# Altium PCB UKU208.PcbDoc (part 2 of 2)
Units mm, origin at the board's own origin, x right, y up, seen from the top; angles counter-clockwise.
Board outline 222.4 x 162.3 mm, 2 copper layers (Top Layer, Bottom Layer); 178 components, 227 nets, 717 pads, 311 vias.
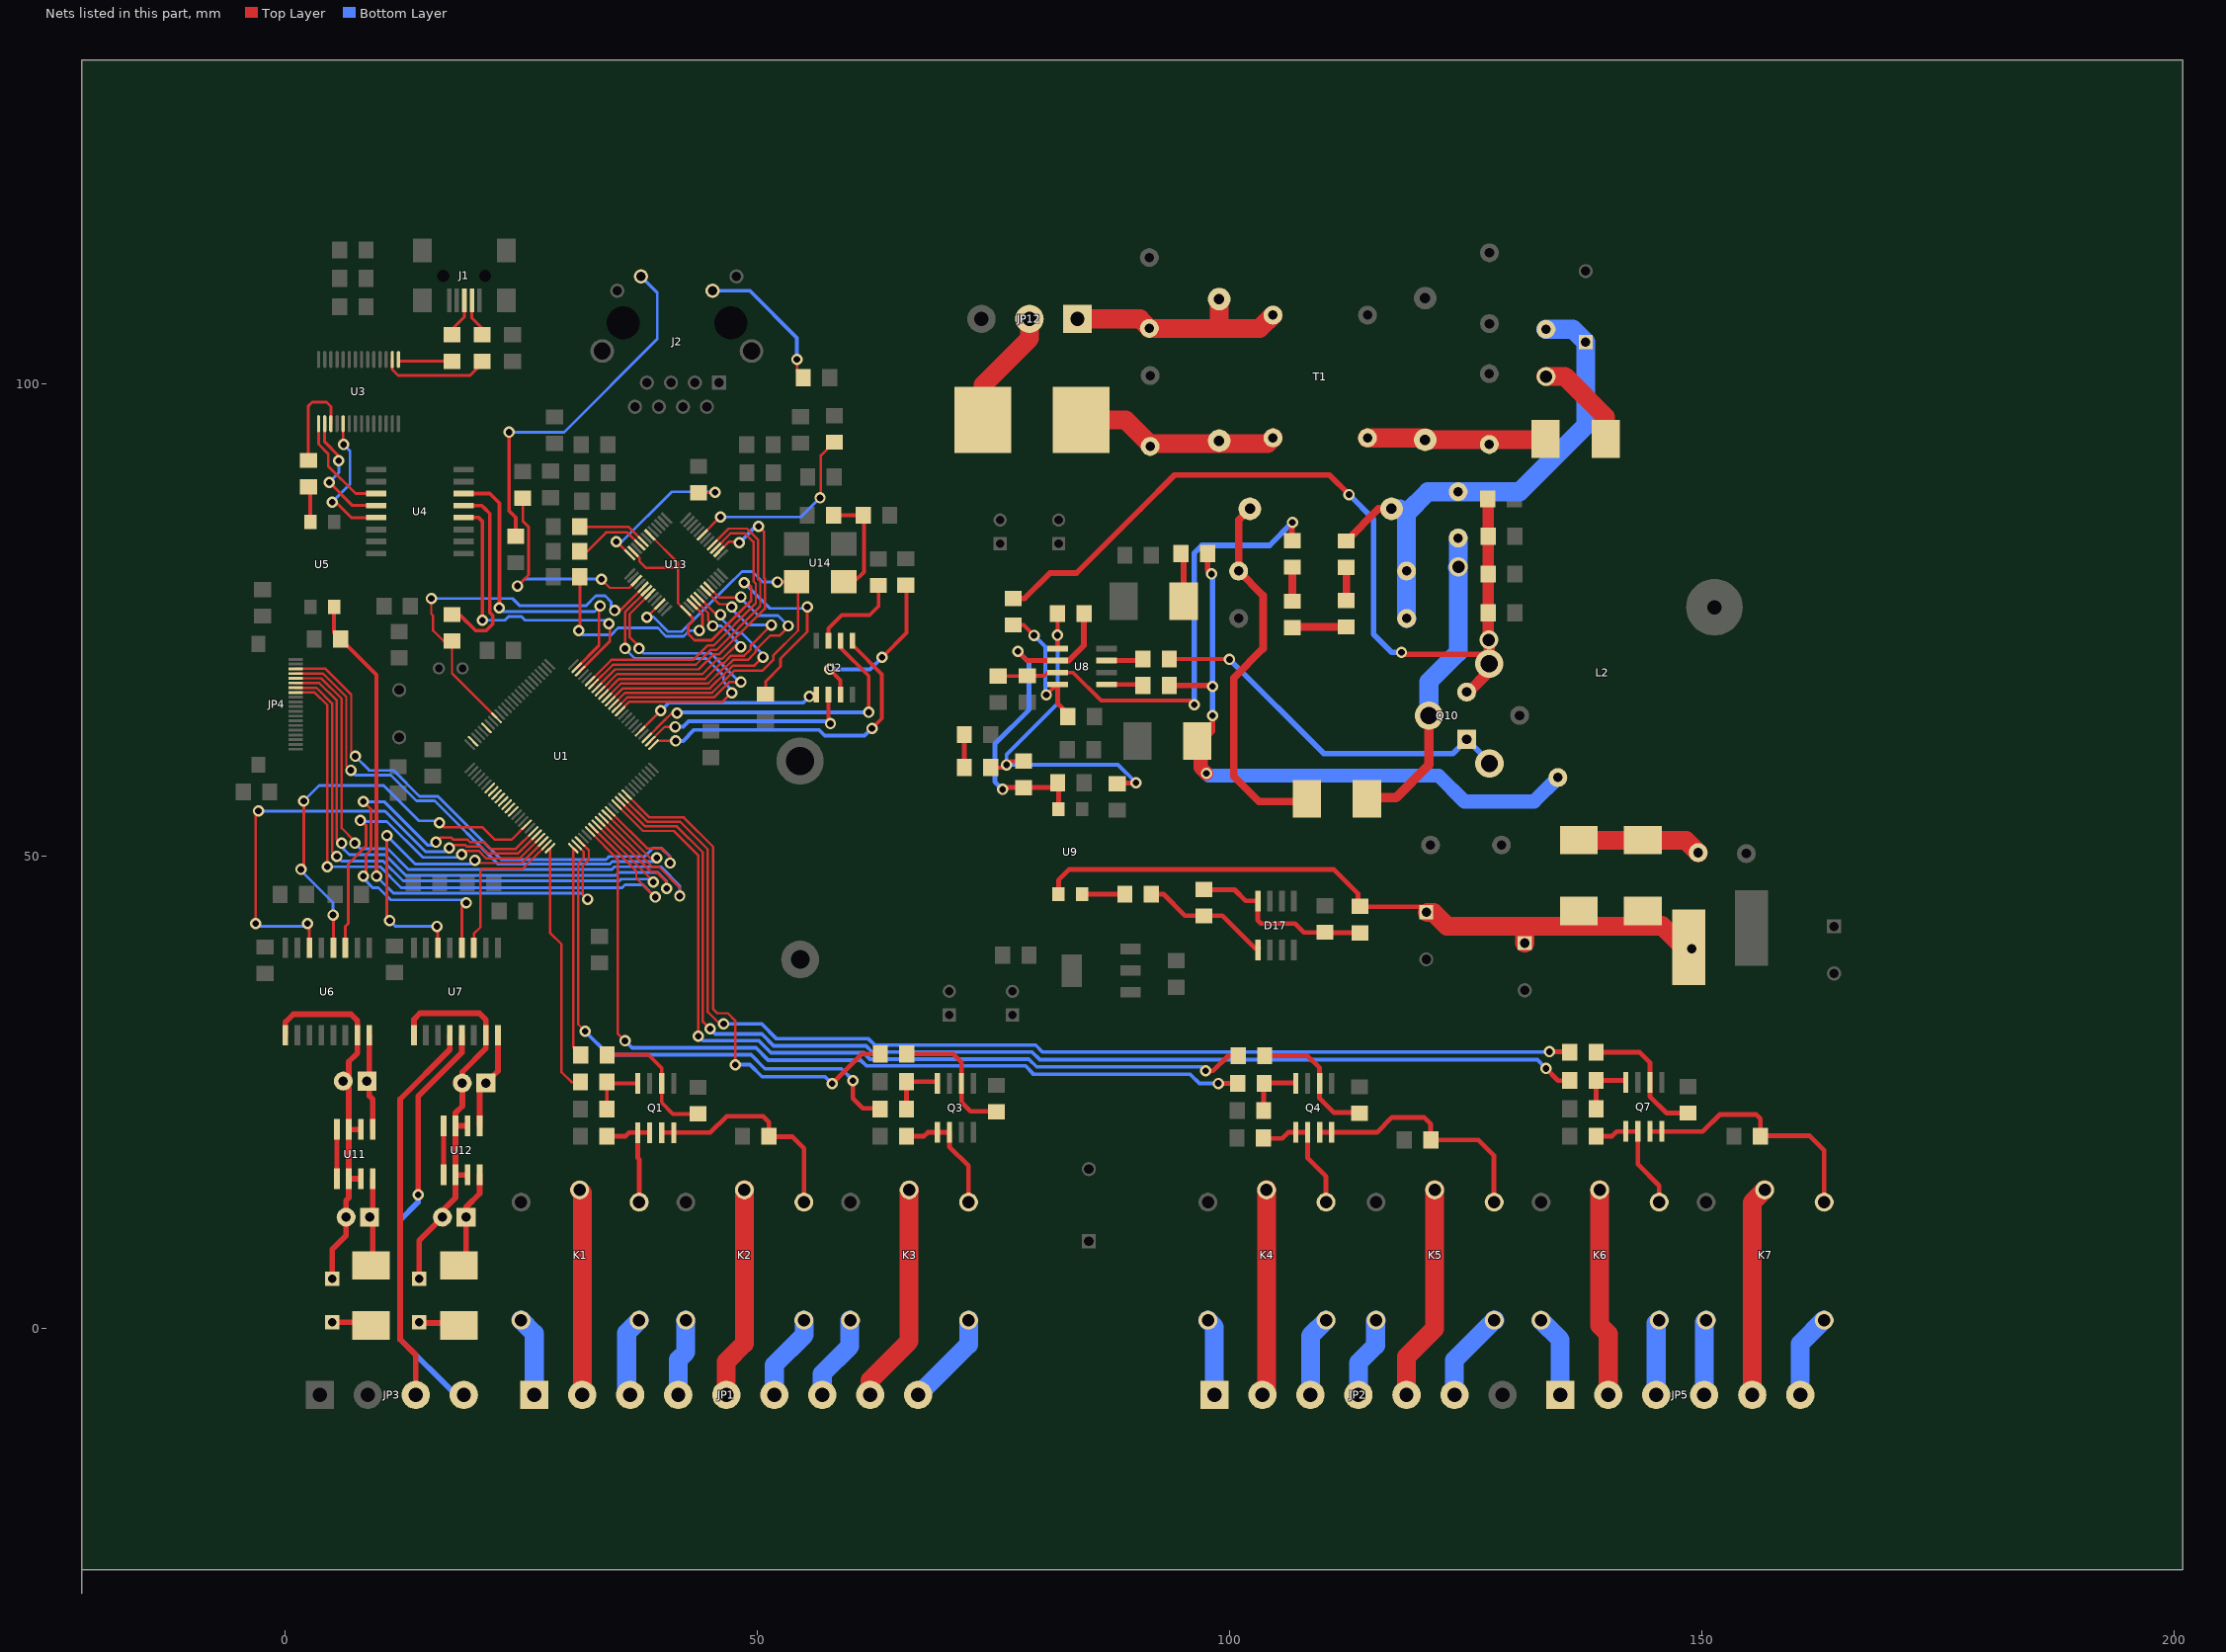
[diagram p2: the nets of this part, all layers, seen from the top]

## Via types
v1: diameter 1.2, hole 0.7, Top Layer to Bottom Layer, 302 vias
v2: diameter 1.8, hole 1, Top Layer to Bottom Layer, 5 vias
v3: diameter 2, hole 1.3, Top Layer to Bottom Layer, 2 vias
v4: diameter 3, hole 1.8, Top Layer to Bottom Layer, 2 vias

## Nets (pads, with @x,y where several pads share a name; then routed paths per layer and width w, separated by ;. In a path a pad name is that pad's centre, name@x,y a point inside that pad or via, vN(x,y) a via of type N, cw(c..) or ccw(c..) an arc to the next point about the centre after c; other vN are vias at no path point) (continued)
NetC25_1: C25.1 D12.2 R36.2 | length 40
  Top Layer w0.8: C25.1@102.15,86.8 100.957,85.607 R36.2@100.957,80.208 103.55,77.615 103.55,72 100.45,68.9 100.45,58.475 103.1,55.825 D12.2@108.15,55.825
NetC25_2: C25.2 C35.1 L2.1 R29.1 R30.2 R35.2 R36.1 | length 55.6
  Top Layer w0.8: R30.2@112.357,83.388 115.769,86.8 C25.2@117.15,86.8
  Bottom Layer w2: C25.2@117.15,86.8 118.024,86.8 118.725,86.099 ; 118.725,84.925 118.725,86.325 121,88.6 130.7,88.6 137.7,95.6 C35.1@137.7,104.45 136.35,105.8 R29.1@133.5,105.8 ; 118.737,84.925 118.737,75.198 R35.2@118.743,75.192
NetC26_1: C26.1 C32.1 JP12.1 T1.1 | length 24.8
  Top Layer w2: JP12.1@83.9,106.9 90.505,106.9 C32.1@91.508,105.898 103.198,105.898 T1.1@104.6,107.3 ; 98.8,105.898 98.9,105.998 C26.1@98.9,109
NetC26_2: C26.2 C30.2 F1.1 T1.3 | length 21.6
  Top Layer w2: F1.1@84.3,96.2 89,96.2 91.5,93.7 104,93.7 T1.3@104.6,94.3
NetC27_1: C27.1 C28.1 D8.2 D16.2 L1.1 R44.1 U9.1 | length 75.1
  Top Layer w0.5: U9.1@81.9,46 81.9,47.5 83.025,48.625 111.025,48.625 113.6,46.05 R44.1@113.6,44.7 ; R44.1@113.8,44.675 120.244,44.675 C27.1@120.818,44.101
  Top Layer w2: C27.1@120.95,44.075 121.575,44.075 123.038,42.612 145.838,42.612 ; C28.1@131.243,40.826 131.243,42.607 ; 145.749,42.701 145.838,42.612 ; L1.1@148.1,40.35 L1.1@148.55,40.35 ; L1.1@148.75,40.125 148.325,40.125 145.838,42.612
  other v2: 148.9,40.225
NetC31_2: C31.2 C34.2 D11.1 T1.4 | length 18.9
  Top Layer w2: T1.4@114.6,94.3 C34.2@120.7,94.3 ; C34.2@120.7,94.1 133.365,94.1 D11.1@133.459,94.194
NetC36_1: C36.1 R33.2 R38.1 R43.2 U8.1 | length 40.1
  Top Layer w0.4: R38.1@74.712,59.407 76.107,59.407 76.788,60.088 R33.2@78.207,60.088 ; C36.1@81.788,75.693 81.788,72.004 U8.1@81.789,72.002
  Top Layer w0.5: R43.2@87.925,57.775 v1@90.131,57.775
  Bottom Layer w0.4: v1(81.788,73.412) 81.788,66.188 76.4,60.8 v1(76.4,59.7) 88.2,59.7 v1(90.1,57.8)
NetC36_2: C36.2 C39.2 R33.1 U8.2 U9.4 | length 37.2
  Top Layer w0.5: v1(75.975,57.1) 76.163,57.288 81.812,57.288 C39.2@81.9,57.2 ; v1(77.6,71.7) 78.568,70.732 U8.2@81.789,70.732 ; C39.2@81.812,57.807 81.9,57.719 U9.4@81.9,55
  Top Layer w0.6: U8.2@81.789,70.732 82.982,70.732 84.575,72.325 C36.2@84.575,75.65
  Bottom Layer w0.5: v1(75.975,57.1) 75.15,57.925 75.15,61.9 78.775,65.525 78.775,70.525 v1(77.6,71.7)
NetC37_1: C37.1 R34.1 R42.2 U8.3 | length 52
  Top Layer w0.4: R42.2@75.707,69.088 78.569,69.088 C37.1@78.594,69.113 80.413,69.113 80.762,69.462 83.438,69.462 86.4,66.5 95.8,66.5 v1(96.25,66.05) ; v1@106.6,85.3 v1(106.65,85.35)
  Top Layer w0.6: R34.1@106.6,83.3 v1@106.6,85.3
  Bottom Layer w0.6: v1(96.25,66.05) 96.25,82.1 97.075,82.925 104.225,82.925 v1(106.65,85.35)
NetC38_1: C38.1 R45.2 U8.4 | length 15
  Top Layer w0.4: R45.2@77.093,74.512 77.106,74.5 78.2,74.5 v1(79.3,73.4) ; v1(80.6,67.1) 81.692,68.192 U8.4@81.789,68.192
  Top Layer w0.5: U8.4@81.789,68.192 81.789,66.211 82.888,65.112 C38.1@82.888,64.793
  Bottom Layer w0.4: v1(79.3,73.4) 80.5,72.2 80.5,67.2 v1(80.6,67.1)
NetC40_1: C40.1 D17.8 R41.1 R44.2 | length 19.5
  Top Layer w0.5: C40.1@97.25,46.475 100.525,46.475 101.711,45.289 D17.8@102.998,45.289 ; D17.8@102.975,45.175 102.975,43.25 103.325,42.9 106.925,42.9 107.875,41.95 110.125,41.95 110.163,41.912 R44.2@113.793,41.912
NetC40_2: C40.2 D17.1 R50.1 | length 13.7
  Top Layer w0.5: R50.1@91.712,46.007 92.993,46.007 95.275,43.725 99.25,43.725 102.675,40.3 D17.1@103.075,40.3
NetC43_1: C43.1 D9.2 U11.8 | length 9.3
  Top Layer w0.6: D9.2@9.114,6.71 9.31,6.905 U11.8@9.31,15.889
NetC43_2: C43.2 C44.2 U6.9 U6.15 U11.2 U11.3 U11.6 U11.7 X2.1 | length 41.4
  Top Layer w0.6: U6.9@0.055,31.075 0.055,32.455 0.9,33.3 7,33.3 7.675,32.625 7.675,29.175 6.77,28.27 6.77,13.87 6.479,13.579 6.479,9.879 5.012,8.412 X2.1@5.012,5.305 ; C44.2@6.179,26.214 C44.2@6.77,25.624 ; U11.6@6.77,15.889 U11.7@8.04,15.889 ; U11.3@6.77,21.089 U11.2@8.04,21.089
NetC44_1: C44.1 U6.16 U11.1 | length 10.1
  Top Layer w0.6: U6.16@8.945,31.075 8.945,24.655 9.31,24.29 U11.1@9.31,21.089
NetC45_1: C45.1 D18.2 U12.8 | length 10.8
  Top Layer w0.6: D18.2@18.414,6.71 19.179,7.474 19.179,12.879 20.61,14.31 U12.8@20.61,16.289 ; C45.1@19.179,11.814 C45.1@19.41,12.045
NetC45_2: C45.2 C46.2 U7.9 U7.15 U12.2 U12.3 U12.6 U12.7 X4.1 | length 43
  Top Layer w0.6: U7.9@13.655,31.075 13.655,32.755 14.3,33.4 20.6,33.4 21.275,32.725 U7.15@21.275,31.075 21.275,29.675 18.779,27.179 18.779,23.579 18.07,22.87 18.07,13.87 16.679,12.479 C45.2@16.679,11.814 ; X4.1@14.212,5.305 14.212,9.347 C45.2@16.879,12.014 ; U12.6@18.07,16.289 U12.7@19.34,16.289 ; U12.3@18.07,21.489 U12.2@19.34,21.489
NetC46_1: C46.1 U7.16 U12.1 | length 10.4
  Top Layer w0.6: U12.1@20.61,21.489 20.61,25.345 22.545,27.281 U7.16@22.545,31.075
NetC55_1: C55.1 R66.1 U14.4 | length 11.8
  Top Layer w0.4: C55.1@58.093,86.105 61.33,86.105 R66.1@61.35,86.125 ; U14.4@59.175,79.075 60.275,79.075 61.3,80.1 61.3,85.975 R66.1@61.2,86.075
NetC56_1: C56.1 U13.18 U13.23 U13.37 | length 48.3
  Top Layer w0.254: U13.23@36.868,82.274 37.55,81.592 37.55,81.2 38.225,80.525 41.375,80.525 41.6,80.7 ; U13.18@38.636,84.042 41.6,81.078 41.6,76.835 U13.37@42.419,76.016
  Top Layer w0.3: U13.37@42.419,76.016 43.175,75.26 43.175,74.9 42.675,74.4 42.675,73.575 43.375,72.875 45.175,72.875 49.35,77.05 49.35,78.5 48.875,78.975 v1(48.625,78.975) ; C56.1@50.9,67.2 50.9,68.525 52.475,70.1 52.475,70.95 55.3,73.775 v1(55.3,76.4)
  Bottom Layer w0.3: v1(48.625,78.975) 51.35,76.25 55.15,76.25 v1(55.3,76.4)
NetC?_2: 
NetC?_2: 
NetC?_2: 
NetC?_2: 
NetD1_1: D1.1 K1.4 Q1.5 Q1.6 | length 12.2
  Top Layer w0.5: D1.1@34.095,20.391 36.066,20.391 36.438,20.763 Q1.6@38.62,20.763 ; Q1.5@37.35,20.763 37.35,18.098 37.498,17.95 37.498,13.373 K1.4@37.475,13.35
NetD2_1: D2.1 K2.4 Q1.7 Q1.8 | length 24.2
  Top Layer w0.5: Q1.7@39.89,20.763 45.038,20.763 46.775,22.5 50.625,22.5 51.25,21.875 51.25,20.325 53.725,20.325 54.96,19.09 K2.4@54.96,13.265 ; K2.4@54.9,13.404 54.9,13.325 K2.4@55,13.225
NetD3_1: D3.1 K3.4 Q3.5 Q3.6 | length 12.9
  Top Layer w0.5: D3.1@65.795,20.391 67.666,20.391 68.063,20.788 Q3.6@70.345,20.788 70.345,19.28 72.374,17.251 K3.4@72.374,13.404
NetD4_1: D4.1 K4.4 Q4.5 Q4.6 | length 13.1
  Top Layer w0.5: D4.1@103.675,20.15 105.55,20.15 106.188,20.788 Q4.6@108.27,20.788 108.27,18.055 110.208,16.117 K4.4@110.208,13.404 ; K4.4@110.208,13.425 K4.4@110.275,13.425
NetD5_1: D5.1 K5.4 Q4.7 Q4.8 | length 26.8
  Top Layer w0.5: Q4.7@109.54,20.788 115.588,20.788 117.175,22.375 120.6,22.375 121.275,21.7 121.275,20.075 121.327,20.023 121.35,20 126.35,20 127.975,18.375 K5.4@127.975,13.275
NetD6_1: D6.1 K6.4 Q7.5 Q7.6 | length 13
  Top Layer w0.5: D6.1@138.795,20.391 140.491,20.391 140.975,20.875 Q7.6@143.2,20.875 ; Q7.6@143.22,20.888 143.22,17.405 145.474,15.151 K6.4@145.474,13.404
NetD7_1: D7.1 K7.4 Q7.7 Q7.8 | length 27.3
  Top Layer w0.5: Q7.7@144.49,20.888 145.763,20.888 150.088,20.888 151.875,22.675 155.75,22.675 156.195,22.23 156.195,20.43 156.2,20.425 161.425,20.425 162.941,18.909 K7.4@162.941,13.404
NetD8_1: D8.1 D16.1 L2.8 | length 13.1
  Top Layer w2: D16.1@137.025,51.7 148.3,51.7 L2.8@149.6,50.4
NetD9_1: D9.1 X1.1 | length 4.2
  Top Layer w0.6: X1.1@5.012,0.705 8.77,0.705 D9.1@9.114,0.36
NetD10_2: D10.2 U4.13 | length 20.2
  Top Layer w0.4: D10.2@17.691,75.605 17.796,75.5 18.6,75.5 20.2,73.9 21.3,73.9 22,74.6 22,75.5 21.7,75.8 21.7,86.3 21.099,86.901 20.86,87.14 U4.13@18.932,87.14
NetD11_2: D11.2 R29.2 | length 10.4
  Top Layer w2: R29.2@133.5,100.8 135.5,100.8 139.809,96.491 D11.2@139.809,94.194
NetD12_1: D12.1 L2.2 Q10.2 | length 33.3
  Top Layer w1: D12.1@114.741,56.206 117.606,56.206 121.1,59.7 Q10.2@121.1,64.9
  Bottom Layer w2: Q10.2@121,65 Q10.2@121.1,64.9 121.1,68.5 124.2,71.6 L2.2@124.2,83.7 ; v3@124.125,80.6 v3@124.2,80.675
  other v3: 124.225,80.65
NetD13_1: D13.1 R8.1 | length 5.1
  Top Layer w0.6: R8.1@94.863,82.068 95.15,81.781 D13.1@95.15,77.05
NetD14_1: D14.1 L2.4 R8.2 R39.1 | length 68.7
  Top Layer w0.6: R39.1@93.612,68.107 98.093,68.107 v1(98.2,68) ; D14.1@97.075,62.15 98.2,63.275 v1(98.2,64.9) v1@98.041,64.741 ; R8.2@97.663,82.068 97.663,80.337 v1(98.1,79.9)
  Top Layer w1.5: D14.1@96.95,62.175 96.95,59.4 v1(97.55,58.8)
  Bottom Layer w0.6: v1(98.1,79.9) 98.2,79.8 98.2,65 98.3,64.9 v1(98.2,64.9)
  Bottom Layer w1.5: v1(97.55,58.8) 97.8,58.55 122.125,58.55 124.875,55.8 132.225,55.8 L2.4@134.75,58.325
NetD18_1: D18.1 X3.1 | length 4.4
  Top Layer w0.6: X3.1@14.212,0.605 17.959,0.605 D18.1@18.414,1.06
NetD?_1: 
NetD?_1: 
NetD?_1: 
NetD?_1: 
NetD?_1: 
NetD?_1: 
NetD?_1: 
NetF1_2: F1.2 JP12.2 | length 12.7
  Top Layer w2: F1.2@73.9,96.2 73.9,99.9 78.82,104.82 JP12.2@78.82,106.9
NetJ1_2: J1.2 R26.1 | length 4.1
  Top Layer w0.3: J1.2@19.8,108.87 19.8,107 20.893,105.907 R26.1@20.893,105.212
NetJ1_3: J1.3 R25.1 | length 4.2
  Top Layer w0.3: R25.1@17.693,105.212 17.693,105.793 19,107.1 J1.3@19,108.87
NetJ2_10: J2.10 R64.1 | length 15.5
  Top Layer w0.254: v1(54.2,102.6) 54.2,101.352 R64.1@54.882,100.67
  Bottom Layer w0.4: J2.10@45.27,109.88 49.245,109.88 49.245,109.855 54.2,104.9 v1@54.2,102.575
NetJ2_11: J2.11 R65.1 | length 38.5
  Top Layer w0.4: v1@23.725,94.95 23.725,86.6 24.445,85.88 R65.1@24.445,83.893
  Bottom Layer w0.3: v1(23.725,94.9) 29.55,94.9 39.425,104.775 39.425,109.675 J2.11@37.7,111.4
NetJP1_1: JP1.1 K1.3 | length 8.5
  Bottom Layer w2: K1.3@24.975,0.925 26.4,-0.5 JP1.1@26.4,-7 ; K1.3@25.008,0.892 K1.3@25.008,0.904
NetJP1_2: JP1.2 K1.1 | length 21.8
  Top Layer w2: K1.1@31.175,14.7 31.48,14.395 JP1.2@31.48,-7
NetJP1_3: JP1.3 K1.2 | length 8.6
  Bottom Layer w2: JP1.3@36.56,-7 36.175,-6.615 36.175,-0.429 K1.2@37.508,0.904
NetJP1_4: JP1.4 K2.3 | length 8.2
  Bottom Layer w2: JP1.4@41.64,-7 41.64,-3.285 42.441,-2.484 K2.3@42.441,0.904
NetJP1_5: JP1.5 K2.1 | length 22.5
  Top Layer w2: JP1.5@46.73,-7 46.73,-3.47 48.641,-1.559 K2.1@48.641,14.704
NetJP1_6: JP1.6 K2.2 | length 9.2
  Bottom Layer w2: JP1.6@51.81,-7 51.81,-3.815 54.975,-0.65 54.975,0.87 K2.2@54.941,0.904
NetJP1_7: JP1.7 K3.3 | length 9.1
  Bottom Layer w2: JP1.7@56.89,-7 56.89,-4.76 59.8,-1.85 K3.3@59.8,0.9
NetJP1_8: JP1.8 K3.1 | length 23.4
  Top Layer w2: JP1.8@61.955,-7 61.955,-5.445 66.074,-1.326 66.074,14.624 K3.1@66.1,14.65
NetJP1_9: JP1.9 K3.2 | length 10.1
  Bottom Layer w2: JP1.9@67.035,-7 72.374,-1.661 K3.2@72.374,0.904
NetJP2_1: JP2.1 K4.3 | length 8.2
  Bottom Layer w2: K4.3@97.708,0.904 98.4,0.212 JP2.1@98.4,-7
NetJP2_2: JP2.2 K4.1 | length 21.9
  Top Layer w2: JP2.2@103.475,-7.025 103.49,-7.01 103.908,-6.592 K4.1@103.908,14.704
NetJP2_3: JP2.3 K4.2 | length 8.6
  Bottom Layer w2: JP2.3@108.56,-7 108.56,-0.744 K4.2@110.208,0.904
NetJP2_4: JP2.4 K5.3 | length 8.7
  Bottom Layer w2: JP2.4@113.64,-7 113.64,-3.585 115.454,-1.771 115.454,0.85 K5.3@115.508,0.904
NetJP2_5: JP2.5 K5.1 | length 22.9
  Top Layer w2: JP2.5@118.73,-7 118.73,-2.97 121.708,0.008 K5.1@121.708,14.704
NetJP2_6: JP2.6 K5.2 | length 9.7
  Bottom Layer w2: JP2.6@123.81,-7 123.81,-3.294 K5.2@128.008,0.904 K5.2@128.071,0.904
NetJP3_3: JP3.3 U7.12 | length 40.9
  Top Layer w0.6: JP3.3@13.86,-7 13.86,-2.76 12.2,-1.1 12.2,24.3 17.465,29.565 U7.12@17.465,31.075
NetJP3_4: JP3.4 U7.13 | length 44.1
  Top Layer w0.6: v1(14.1,14.2) 14.1,24.6 18.735,29.235 U7.13@18.735,31.075
  Bottom Layer w0.6: v1(14.1,14.2) 14.1,13.4 12.2,11.5 12.2,-1.1 18.1,-7 JP3.4@18.94,-7
NetJP5_1: 
NetJP5_1: JP5.1 K6.3 | length 8.7
  Bottom Layer w2: K6.3@132.975,0.875 135,-1.15 JP5.1@135,-7
NetJP5_2: 
NetJP5_2: JP5.2 K6.1 | length 22.1
  Top Layer w2: K6.1@139.174,14.704 139.174,0.376 140.08,-0.53 JP5.2@140.08,-7
NetJP5_3: JP5.3 K6.2 | length 8.1
  Bottom Layer w2: JP5.3@145.16,-7 145.16,0.585 K6.2@145.5,0.925
NetJP5_4: JP5.4 K7.3 | length 8
  Bottom Layer w2: JP5.4@150.24,-7 150.24,0.715 K7.3@150.45,0.925
NetJP5_5: JP5.5 K7.1 | length 22.2
  Top Layer w2: JP5.5@155.33,-7 155.33,13.393 K7.1@156.641,14.704
NetJP5_6: JP5.6 K7.2 | length 9
  Bottom Layer w2: JP5.6@160.41,-7 160.41,-1.565 K7.2@162.9,0.925
NetJP?_1: 
NetJP?_1: 
NetJP?_1: 
NetJP?_1: 
NetJP?_1: 
NetJP?_1: 
NetJP?_1: 
NetJP?_2: 
NetJP?_2: 
NetJP?_2: 
NetJP?_2: 
NetJP?_2: 
NetJP?_2: 
NetJP?_2: 
NetJP?_3: 
NetJP?_3: 
NetJP?_3: 
NetJP?_3: 
NetJP?_3: 
NetJP?_3: 
NetJP?_3: 
NetL2_5: 
NetL2_6: 
NetQ1_2: Q1.2 R2.2 R10.2 | length 14.4
  Top Layer w0.4: R2.2@34.113,28.993 38.482,28.993 39.89,27.585 39.89,23.935 41.075,22.75 R10.2@43.775,22.75
NetQ1_4: Q1.4 R1.2 R9.2 | length 6.1
  Top Layer w0.4: R9.2@34.088,23.268 34.088,26.038 34.1,26.05 34.187,25.963 Q1.4@37.35,25.963
NetQ3_2: Q3.2 R18.2 R23.2 | length 14.4
  Top Layer w0.5: R23.2@65.838,29.093 70.732,29.093 71.625,28.2 71.625,23.975 72.575,23.025 R18.2@75.2,23.025
NetQ3_4: Q3.4 R3.2 R11.2 | length 6.2
  Top Layer w0.5: R11.2@65.8,26.175 R11.2@65.813,26.162 ; R3.2@65.813,23.268 R11.2@65.813,26.162 ; Q3.4@69.075,25.988 68.901,26.162 R11.2@65.813,26.162
NetQ4_2: Q4.2 R5.2 R13.2 | length 14.3
  Top Layer w0.5: R5.2@103.713,28.893 108.232,28.893 109.525,27.6 109.525,24.4 111.025,22.9 R13.2@113.7,22.9
NetQ4_4: Q4.4 R4.2 R12.2 | length 6.3
  Top Layer w0.5: R12.2@103.613,23.093 103.613,25.938 103.653,25.978 103.7,26.025 106.925,26.025 Q4.4@106.975,25.975
NetQ7_2: Q7.2 R7.2 R15.2 | length 14.5
  Top Layer w0.5: R7.2@138.813,29.268 143.407,29.268 144.49,28.185 144.49,24.61 146.263,22.837 R15.2@148.543,22.837
NetQ7_4: Q7.4 R6.2 R14.2 | length 6.4
  Top Layer w0.5: R14.2@138.775,23.125 138.813,23.163 R6.2@138.813,26.293 141.732,26.293 141.875,26.15 Q7.4@141.925,26.15
NetQ10_1: Q10.1 R40.1 | length 39.8
  Top Layer w0.4: R40.1@93.612,70.907 99.943,70.907 v1(100,70.85)
  Bottom Layer w0.6: v1(100,70.85) 109.975,60.875 123.625,60.875 Q10.1@125.125,62.375 ; Q10.1@125.1,62.375 Q10.1@125.125,62.375 ; v4@127.5,59.875 127.5,60 Q10.1@125.125,62.375
  other v4: 127.5,59.825
NetQ10_3: Q10.3 R45.1 R46.1 R47.1 R48.1 R49.1 | length 93.2
  Top Layer w0.6: R45.1@77.093,77.312 78.312,77.312 81,80 83.8,80 90.604,86.804 94.175,90.375 110.575,90.375 v1(112.65,88.3) ; v1(118.2,71.6) 118.407,71.393 v4@127.388,71.393
  Top Layer w1.2: Q10.3@125.1,67.4 125.3,67.4 127.388,69.488 v4@127.388,71.393 ; R49.1@127.338,87.843 127.388,87.793 R47.1@127.388,79.893 R48.1@127.388,75.793 v3@127.388,72.925 ; v3(127.45,72.925) 127.475,72.9 v4(127.475,70.4)
  Bottom Layer w0.6: v1(112.65,88.3) 115.25,85.7 115.25,73.5 117.15,71.6 v1(118.2,71.6)
NetQ?_1: 
NetQ?_1: 
NetQ?_1: 
NetQ?_1: 
NetQ?_1: 
NetQ?_1: 
NetQ?_1: 
NetR19_1: R19.1 U2.3 | length 18
  Top Layer w0.4: v1(57.675,69.8) 58.81,68.665 U2.3@58.81,67.125 ; v1(63.225,71.075) 65.8,73.65 R19.1@65.8,78.8
  Bottom Layer w0.4: v1(57.675,69.8) 61.95,69.8 v1(63.225,71.075)
NetR20_2: R20.2 U2.7 | length 9.7
  Top Layer w0.4: U2.7@57.54,72.825 57.54,74.14 58.95,75.55 61.9,75.55 62.85,76.5 R20.2@62.85,78.625
NetR25_2: R25.2 U3.15 | length 5.8
  Top Layer w0.3: U3.15@12.019,102.604 12.211,102.412 R25.2@17.693,102.412
NetR26_2: R26.2 U3.16 | length 11.6
  Top Layer w0.3: U3.16@11.369,102.604 11.369,101.531 12,100.9 19.6,100.9 20.893,102.193 R26.2@20.893,102.412
NetR27_1: R27.1 U3.3 | length 10.3
  Top Layer w0.3: R27.1@2.493,91.912 2.493,97.693 2.9,98.1 4.4,98.1 4.869,97.631 U3.3@4.869,95.804
NetR27_2: R27.2 U5.2 | length 3.8
  Top Layer w0.4: R27.2@2.493,89.112 2.7,88.906 U5.2@2.7,85.4
NetR30_1: R30.1 R31.2 | length 3.5
  Top Layer w0.8: R31.2@112.357,77.088 R30.1@112.357,80.588
NetR31_1: R31.1 R32.2 | length 5.7
  Top Layer w0.8: R32.2@106.643,74.212 106.719,74.288 R31.1@112.357,74.288
NetR32_1: R32.1 R34.2 | length 3.6
  Top Layer w0.8: R32.1@106.643,77.012 R34.2@106.643,80.612
NetR37_2: R37.2 R38.2 | length 3.5
  Top Layer w0.5: R38.2@71.912,59.407 R37.2@71.912,62.907
NetR39_2: R39.2 U8.5 | length 3.9
  Top Layer w0.5: U8.5@86.989,68.192 90.727,68.192 R39.2@90.812,68.107
NetR40_2: R40.2 U8.7 | length 3.9
  Top Layer w0.5: U8.7@86.989,70.732 90.638,70.732 R40.2@90.812,70.907
NetR50_2: R50.2 U9.2 | length 4.4
  Top Layer w0.5: U9.2@84.4,46 88.8,46 R50.2@88.825,46.025
NetR52_1: R52.1 U13.7 | length 20.6
  Top Layer w0.254: U13.7@44.187,84.042 46.1,85.955 v1(46.13,85.925) ; v1(56.65,87.95) 56.75,88.05 56.75,92.452 R52.1@58.155,93.857
  Bottom Layer w0.3: v1(46.13,85.925) 54.6,85.925 56.625,87.95 v1(56.65,87.95)
NetR54_1: R54.1 U13.27 | length 23.7
  Top Layer w0.254: v1(33.5,79.325) 34.4,78.425 36.449,78.425 U13.27@37.222,79.198
  Top Layer w0.3: v1(24.625,78.625) 25.8,79.8 25.8,84.875 25.2,85.475 R54.1@25.2,88
  Bottom Layer w0.3: v1(24.625,78.625) 24.65,78.625 25.375,79.35 33.475,79.35 v1(33.5,79.325)
NetR56_1: R56.1 U13.39 | length 22.9
  Top Layer w0.3: v1(31.1,73.9) 31.218,74.018 R56.1@31.218,79.605 ; U13.39@43.126,76.723 44.2,75.65 44.2,74.4 v1@43.7,73.9
  Bottom Layer w0.3: v1(31.1,73.9) 31.525,73.475 34.575,73.475 35.275,74.175 39.482,74.175 40.137,73.52 40.347,73.31 42.228,73.31 42.818,73.9 v1@43.7,73.9
  other v1: 43.875,73.925
NetR57_1: R57.1 U13.21 | length 7.7
  Top Layer w0.254: R57.1@31.218,82.305 32.005,82.305 34,84.3 36.257,84.3 U13.21@37.575,82.981
NetR58_1: R58.1 U13.20 | length 7.4
  Top Layer w0.254: R58.1@31.218,84.905 36.359,84.905 U13.20@37.929,83.335
NetR63_2: R63.2 U13.24 | length 16.4
  Top Layer w0.254: v1(35.075,83.325) 35.11,83.325 U13.24@36.515,81.92 ; R63.2@43.795,88.493 45.468,88.493 v1(45.525,88.55)
  Bottom Layer w0.3: v1(35.075,83.325) 35.675,83.325 40.95,88.6 45.475,88.6 v1(45.525,88.55)
NetR?_1: 
NetR?_2: 
NetU3_1: U3.1 U4.3 | length 11.2
  Top Layer w0.3: U3.1@3.569,95.804 3.569,93.631 4.6,92.6 4.6,91.3 7.49,88.41 U4.3@9.682,88.41
NetU3_2: U3.2 U4.4 | length 13.2
  Top Layer w0.3: U3.2@4.219,95.804 4.219,93.881 5.7,92.4 v1(5.7,91.9) ; v1(4.7,89.6) 7.16,87.14 U4.4@9.682,87.14
  Bottom Layer w0.3: v1(4.7,89.6) 5.7,90.6 v1(5.7,91.9)
NetU3_5: U3.5 U4.5 | length 14.8
  Top Layer w0.3: v1(5,87.5) 5.4,87.5 7.03,85.87 U4.5@9.682,85.87 ; U3.5@6.169,95.804 6.169,93.631 v1(6.2,93.6)
  Bottom Layer w0.3: v1(5,87.5) 6.9,89.4 6.9,92.9 v1(6.2,93.6)
NetU4_9: 
NetU4_9: 
NetU4_10: 
NetU4_10: 
NetU11_4: U11.4 U11.5 | length 5.2
  Top Layer w0.5: U11.5@5.5,15.889 U11.4@5.5,21.089
NetU12_4: U12.4 U12.5 | length 5.3
  Top Layer w0.5: U12.5@16.8,16.225 U12.4@16.8,21.489
P0_0: U1.46 U6.6 | length 52.8
  Top Layer w0.254: v1(17.4,50.9) 17.7,51.2 19.1,51.2 19.256,51.044 20.684,51.044 20.728,51 20.8,51 21.5,50.3 24.657,50.3 U1.46@26.648,52.291
  Top Layer w0.3: v1(-3.1,42.9) -3.1,54.5 v1(-2.8,54.8) ; v1@2.525,42.65 2.595,42.58 U6.6@2.595,40.325
  Bottom Layer w0.3: v1(-3.1,42.9) -2.8,42.6 v1@2.525,42.6 ; v1(-2.8,54.8) 10.6,54.8 14.9,50.5 17,50.5 v1(17.4,50.9)
  other v1: 2.4,42.9
P0_1: U1.47 U6.3 | length 36.3
  Top Layer w0.254: v1(18.7,50.2) 19.1,50.6 20.5,50.6 21.3,49.8 24.864,49.8 U1.47@27.002,51.938
  Top Layer w0.3: U6.3@6.405,40.325 6.405,42.605 6.7,42.9 6.7,49.2 8.6,51.1 8.6,53.3 v1@8.2,53.7
  Bottom Layer w0.3: v1@8.2,53.7 10.8,53.7 14.6,49.9 18.4,49.9 v1(18.7,50.2)
  other v1: 8,53.8
P0_2: U1.98 U4.12 | length 33.1
  Top Layer w0.3: U1.98@31.245,69.616 34.4,72.771 v1@34.4,75
  Top Layer w0.4: U4.12@18.932,85.87 20.53,85.87 20.9,85.5 v1(20.9,75)
  Bottom Layer w0.3: v1(20.9,75) 23.29,75 23.682,75.392 25.043,75.392 25.435,75 v1@34.4,75
  other v1: 34.3,74.625
P0_3: U1.99 U4.14 | length 34
  Top Layer w0.3: U1.99@30.891,69.969 33.25,72.328 33.25,76.4 v1(33.375,76.525)
  Top Layer w0.4: U4.14@18.932,88.41 21.69,88.41 22.7,87.4 v1(22.7,76.3)
  Bottom Layer w0.3: v1(22.7,76.3) 23.1,75.9 32.8,75.9 v1@33.4,76.5
P0_5: U1.80 U2.1 | length 20.2
  Top Layer w0.254: U1.80@37.609,63.252 39.236,64.879 v1(39.775,65.418) ; v1(55.525,66.925) 56.1,66.925 U2.1@56.25,67.075
  Bottom Layer w0.4: v1(39.775,65.418) 40.632,66.275 54.875,66.275 v1(55.525,66.925)
P0_7: U1.78 U2.6 | length 33.4
  Top Layer w0.254: U1.78@38.316,62.545 40.236,64.464 ; 40.25,64.45 40.975,65.175 v1(41.525,65.175)
  Top Layer w0.4: U2.6@58.81,72.825 58.81,72.09 61.8,69.1 v1(61.8,65.25)
  Bottom Layer w0.4: v1(41.525,65.175) 41.6,65.25 v1(61.8,65.25)
P0_8: U1.77 U2.2 | length 23.2
  Top Layer w0.254: U1.77@38.669,62.191 40.203,63.725 v1(41.325,63.725)
  Top Layer w0.4: U2.2@57.54,67.125 57.54,64.26 v1(57.75,64.05)
  Bottom Layer w0.4: v1(41.325,63.725) 42.15,63.725 42.725,64.3 57.525,64.3 57.75,64.075 v1(57.75,64.05)
P0_9: U1.76 U2.5 | length 35.4
  Top Layer w0.254: U1.76@39.023,61.837 39.41,62.225 v1(41.375,62.225)
  Top Layer w0.4: U2.5@60.08,72.825 60.08,72.395 63.2,69.275 63.2,64.6 v1(62.15,63.55)
  Bottom Layer w0.4: v1(41.375,62.225) 42.15,62.225 43.325,63.4 56.525,63.4 57.15,62.775 61.375,62.775 v1(62.15,63.55)
P0_10: U1.48 U7.6 | length 35.8
  Top Layer w0.254: v1(20.1,49.6) 20.3,49.4 20.3,49.3 25.071,49.3 U1.48@27.355,51.584
  Top Layer w0.3: v1(10.8,52.2) 10.8,43.5 v1(11.1,43.2) ; v1(16.1,42.6) 16.195,42.505 U7.6@16.195,40.325
  Bottom Layer w0.3: v1(10.8,52.2) 13.8,49.2 19.7,49.2 v1(20.1,49.6) ; v1(11.1,43.2) 11.7,42.6 v1(16.1,42.6)
P0_11: U1.49 U7.3 | length 16.6
  Top Layer w0.254: U7.3@20.005,40.325 20.005,41.805 20.7,42.5 20.7,48.5 20.9,48.7 25.178,48.7 U1.49@27.709,51.231
P0_15: JP4.3 U1.62 | length 62.1
  Top Layer w0.254: JP4.3@1.159,69.857 4.293,69.857 7.025,67.125 7.025,61.025 v1(7.45,60.6) ; U1.62@34.426,54.766 38.343,50.85 39.875,50.85 40.775,49.95 v1(40.775,49.3)
  Bottom Layer w0.3: v1(7.45,60.6) 8.9,59.15 8.9,59.1 11.525,59.1 14.25,56.375 16.2,56.375 22.9,49.675 34.025,49.675 34.35,50 38.075,50 38.925,50.85 39.9,50.85 40.775,49.975 v1(40.775,49.3)
P0_17: JP4.4 U1.61 | length 58.4
  Top Layer w0.254: JP4.4@1.159,69.357 4.043,69.357 6.5,66.9 6.5,59.525 v1@6.9,59.125 ; U1.61@34.1,54.4 38.65,49.85 v1(39.375,49.85)
  Bottom Layer w0.3: v1@6.9,59.125 7.425,58.6 11.2,58.6 13.925,55.875 15.875,55.875 22.575,49.175 34.375,49.175 34.65,49.45 39,49.45 39.375,49.825 v1(39.375,49.85)
  other v1: 6.975,59.125
P0_18: JP4.5 U1.60 | length 71.3
  Top Layer w0.254: JP4.5@1.159,68.857 3.843,68.857 6,66.7 6,53 7.4,51.6 v1(7.4,51.4) ; U1.60@33.719,54.059 38.879,48.9 39.6,48.9 41.8,46.7 v1(41.8,45.8)
  Bottom Layer w0.3: v1(7.4,51.4) 8,50.8 10.9,50.8 13.1,48.6 34.6,48.6 34.9,48.9 39.8,48.9 41.8,46.9 v1(41.8,45.8)
P0_19: JP4.6 U1.59 | length 68.1
  Top Layer w0.254: JP4.6@1.159,68.357 3.643,68.357 5.5,66.5 5.5,51.8 v1@5.9,51.4 ; U1.59@33.366,53.706 33.394,53.706 38.7,48.4 39.3,48.4 40.4,47.3 v1(40.4,46.6)
  Bottom Layer w0.3: v1@5.9,51.4 5.9,51.1 6.8,50.2 10.6,50.2 12.8,48 35,48 35.3,48.3 39.5,48.3 40.4,47.4 v1(40.4,46.6)
  other v1: 6,51.4
P0_20: JP4.7 U1.58 | length 64.3
  Top Layer w0.254: JP4.7@1.159,67.857 3.343,67.857 5,66.2 5,50.5 v1(5.5,50) ; U1.58@33.012,53.352 39,47.364 v1(39,47.3)
  Bottom Layer w0.3: v1(5.5,50) 6,49.5 10.4,49.5 12.5,47.4 35.4,47.4 35.6,47.6 38.7,47.6 v1(39,47.3)
P0_21: JP4.8 U1.57 | length 67.3
  Top Layer w0.254: JP4.8@1.159,67.357 3.143,67.357 4.5,66 v1(4.5,48.9) ; U1.57@32.659,52.999 37.2,48.457 37.2,47.7 v1(39.2,45.7)
  Bottom Layer w0.3: v1(4.5,48.9) 10.1,48.9 12.3,46.7 35.7,46.7 36,47 37.9,47 v1(39.2,45.7)
P0_22: R4.1 U1.56 | length 90.5
  Top Layer w0.254: U1.56@32.305,52.645 35.225,49.725 35.225,31.25 v1(36,30.475)
  Top Layer w0.5: v1(98.807,25.968) R4.1@100.863,25.968
  Bottom Layer w0.4: v1(36,30.475) 36.75,29.725 49.875,29.725 51.15,28.45 60.95,28.45 61.575,27.825 78.4,27.825 79.25,26.975 ; 79.175,26.95 95.825,26.95 96.807,25.968 v1(98.807,25.968)
P0_28: U1.24
P1_0: U1.95 U13.3 | length 32.6
  Top Layer w0.254: U1.95@32.305,68.555 34.55,70.8 43.2,70.8 44.725,72.325 45.375,72.325 49.85,76.8 49.85,78.875 49.6,79.125 49.6,83.3 48.7,84.2 47.173,84.2 U13.3@45.601,82.628
P1_1: U1.94 U13.4 | length 34.3
  Top Layer w0.254: U1.94@32.659,68.237 34.722,70.3 43.5,70.3 45.045,71.845 45.695,71.845 50.325,76.475 50.325,79.125 50.1,79.35 50.1,83.5 48.9,84.7 46.966,84.7 U13.4@45.248,82.981
P1_4: U1.93 U13.2 | length 35.8
  Top Layer w0.254: U1.93@33.012,67.848 34.964,69.8 43.8,69.8 45.4,71.4 45.975,71.4 50.8,76.225 50.8,79.4 50.7,79.5 50.7,84.4 v1@50.1,85 ; U13.2@45.955,82.274 46.981,83.3 v1@48.3,83.3
  Bottom Layer w0.4: v1(48.1,83.2) 49.9,85 v1@50.1,85
  other v1: 50.125,84.925
P1_8: U1.92 U13.40 | length 23.5
  Top Layer w0.254: U1.92@33.366,67.494 35.172,69.3 44.2,69.3 45.8,70.9 46.275,70.9 47.75,72.375 v1@48.125,72.375 ; U13.40@43.48,77.077 44.829,75.728 44.829,74.971 45.3,74.5 v1(45.3,74.4)
  Bottom Layer w0.3: v1@45.5,74.4 46.2,74.4 v1@48,72.6
  other v1: 48.25,72.2
P1_9: U1.91 U13.43 | length 29.5
  Top Layer w0.254: U1.91@33.719,67.141 35.379,68.8 44.5,68.8 46.156,70.456 46.459,70.456 47.253,71.25 48.625,71.25 49.315,71.94 49.315,72.315 v1(51.5,74.5) ; U13.43@44.54,78.137 45.978,76.7 46.8,76.7 v1@47.3,76.2
  Bottom Layer w0.3: v1@47.3,76.2 49,74.5 v1(51.5,74.5)
  other v1: 47.3,76.4
P1_10: U1.90 U13.44 | length 32.9
  Top Layer w0.254: U1.90@34.073,66.787 35.586,68.3 44.8,68.3 46.512,70.012 46.643,70.012 47.431,70.8 49,70.8 49.825,71.625 49.825,71.825 51.4,73.4 52.4,73.4 v1@53.4,74.4 ; U13.44@44.894,78.491 45.985,77.4 v1@48.4,77.4
  Bottom Layer w0.3: v1@48.3,77.3 50.1,75.5 52.2,75.5 53.3,74.4 v1@53.4,74.4
  other v1: 53.275,74.4 48.275,77.475
P1_14: U1.89 U13.41 | length 27.8
  Top Layer w0.254: U1.89@34.427,66.434 35.793,67.8 45,67.8 46.768,69.568 46.827,69.568 47.459,70.2 49.7,70.2 v1(50.6,71.1) ; U13.41@43.833,77.43 45.664,75.6 v1(46.1,75.6)
  Bottom Layer w0.3: v1(46.1,75.6) 46.1,75.3 47.8,73.6 48.4,73.6 50.6,71.4 v1(50.6,71.1)
P1_15: U1.88 U13.34 U14.3 | length 49.9
  Top Layer w0.254: U1.88@34.78,66.08 36.025,67.325 45.225,67.325 47.55,69.65 50.55,69.65 51.7,70.8 51.7,71.275 54.325,73.9 54.325,78.925 U14.3@54.175,79.075 52.175,79.075 v1(52.15,79.05) ; v1(38.325,75.325) 38.325,75.352 U13.34@39.697,76.723
  Bottom Layer w0.3: v1(38.325,75.325) 39.025,75.325 40.55,73.8 42.025,73.8 46.9,78.675 48.375,80.15 49.5,80.15 50.6,79.05 52.1,79.05 52.125,79.025 v1@52.15,79.025
P1_16: U1.87 U13.31 | length 33.6
  Top Layer w0.254: U1.87@35.134,65.727 36.232,66.825 45.4,66.825 47.025,68.45 v1(48.275,68.45) ; v1(37.475,72) 37.475,72.25 36.475,73.25 36.475,75.623 U13.31@38.636,77.784
  Bottom Layer w0.3: v1(37.475,72) 37.975,71.5 45.1,71.5 48.15,68.45 v1(48.275,68.45)
P1_17: U1.86 U13.30 | length 33.6
  Top Layer w0.254: U1.86@35.45,65.35 35.48,65.38 36.481,66.381 46.356,66.381 v1(47.3,67.325) ; v1(36,72) 36,75.855 U13.30@38.283,78.137 ; v1@47.25,67.375 v1@47.4,67.525
  Bottom Layer w0.3: v1(36,72) 37.05,70.95 44.625,70.95 46.425,69.15 46.425,68.5 v1@47.4,67.525
P1_18: U1.32
P1_19: U1.33
P1_20: U1.34
P1_21: U1.35
P1_22: U1.36
P1_23: U1.37
P1_24: U1.38
P1_25: U1.39
P1_26: C17.2 U1.40 U6.5 | length 53
  Top Layer w0.254: v1(0.1,48.55) 0.1,48.6 1.025,49.525 1.025,56.45 v1(2.025,57.45) ; v1(3.85,42.775) 3.865,42.76 U6.5@3.865,40.325 ; v1(15.075,54.85) 16.525,54.85 17.8,53.575 21.1,53.575 21.45,53.225 23.339,53.225 U1.40@24.527,54.413
  Top Layer w0.4: C17.2@-2.107,37.612 3.012,37.612 3.865,38.465 U6.5@3.865,40.325
  Bottom Layer w0.3: v1(0.1,48.55) 0.15,48.55 3.85,44.85 v1(3.85,42.775) ; v1(2.025,57.45) 2.65,58.075 10.85,58.075 14.075,54.85 v1(15.075,54.85)
P1_26: 
P1_27: U1.43 U6.4 | length 44.6
  Top Layer w0.254: v1(16.35,53.55) 16.8,53.1 20.9,53.1 22.225,51.775 24,51.775 U1.43@25.55,53.325
  Top Layer w0.3: v1(1.7,48.625) 2,48.925 v1(2,55.875) ; v1(5.1,43.805) 5.135,43.84 U6.4@5.135,40.325
  Bottom Layer w0.3: v1(1.7,48.625) 1.7,48.525 5.1,45.125 v1@5.1,43.6 ; v1(2,55.875) 3.625,57.5 10.45,57.5 14.175,53.775 16.125,53.775 v1(16.35,53.55)
P1_28: C18.2 U1.44 U7.5 | length 61.6
  Top Layer w0.254: v1(3.1,48.6) 3.1,48.9 4,49.8 4,55.3 v1(3.5,55.8) ; C18.2@11.6,37.7 16.2,37.7 17.5,39 v1(17.5,44.3) ; v1(15.1,52.6) 20.772,52.6 22.041,51.331 22.069,51.331 22.1,51.3 24.243,51.3 U1.44@25.941,52.999
  Bottom Layer w0.3: v1(3.1,48.6) 3.8,47.9 6.9,47.9 10,44.8 17,44.8 v1(17.5,44.3) ; v1(3.5,55.8) 6.9,55.8 8,56.9 10.2,56.9 14.5,52.6 v1(15.1,52.6)
P1_28: 
P1_29: U1.45 U7.4 | length 47.2
  Top Layer w0.254: v1(16,51.5) 16.5,52 17.6,52 17.8,51.8 19.3,51.8 19.6,51.5 21.1,51.5 21.8,50.8 24.45,50.8 U1.45@26.295,52.645
  Top Layer w0.3: v1(8.3,47.9) 8.6,48.2 8.6,50.2 9.1,50.7 9.1,55 v1(8.3,55.8) ; U7.4@18.735,40.325 18.735,44.635 v1(19.2,45.1)
  Bottom Layer w0.3: v1(8.3,47.9) 8.3,47.7 9.3,46.7 9.9,46.7 11.2,45.4 18.9,45.4 v1(19.2,45.1) ; v1(8.3,55.8) 10.5,55.8 15.1,51.2 15.7,51.2 v1(16,51.5)
P1_31: U1.20
P2_6: R23.1 U1.67 | length 53.6
  Top Layer w0.254: U1.67@36.194,56.534 38.609,54.119 42.231,54.119 45.35,51 45.35,33.825 45.775,33.4 46.9,33.4 47.675,32.625 v1(47.675,27.95)
  Top Layer w0.5: v1(57.925,25.95) 61.068,29.093 R23.1@63.038,29.093
  Bottom Layer w0.4: v1(47.675,27.95) 49.225,27.95 50.5,26.675 57.175,26.675 57.925,25.925 v1(57.925,25.95)
P2_7: R7.1 U1.66 | length 121.3
  Top Layer w0.254: U1.66@35.841,56.181 38.346,53.675 41.825,53.675 44.75,50.75 44.75,33.55 46.025,32.275 v1(46.45,32.275)
  Top Layer w0.5: v1(133.85,29.325) R7.1@135.925,29.325
  Bottom Layer w0.4: v1(46.45,32.275) 50.475,32.275 52.05,30.7 61.775,30.7 62.45,30.025 79.475,30.025 80.2,29.3 133.825,29.3 v1(133.85,29.325)
P2_8: R6.1 U1.65 | length 123.2
  Top Layer w0.254: U1.65@35.487,55.827 38.139,53.175 41.5,53.175 44.25,50.425 44.25,32.5 v1(45,31.75)
  Top Layer w0.5: v1(133.5,27.55) 134.775,26.275 R6.1@135.975,26.275
  Bottom Layer w0.4: v1(45,31.75) 45.55,31.2 50.5,31.2 51.75,29.95 61.525,29.95 62.175,29.3 79.1,29.3 79.925,28.475 132.575,28.475 v1(133.5,27.55)
P2_9: R5.1 U1.64 | length 89.3
  Top Layer w0.254: U1.64@35.134,55.473 37.907,52.7 41.175,52.7 43.75,50.125 v1(43.75,30.975)
  Top Layer w0.5: v1(97.45,27.3) 98.25,27.3 99.843,28.893 R5.1@100.913,28.893
  Bottom Layer w0.4: v1(43.75,30.975) 44.225,30.5 50.175,30.5 51.45,29.225 61.25,29.225 61.925,28.55 78.75,28.55 79.575,27.725 97.025,27.725 v1(97.45,27.3)
P2_10: R17.1 U1.53 U5.4 | length 60.7
  Top Layer w0.254: U1.53@31.245,51.584 32.175,50.654 32.175,49.7 31.525,49.05 31.525,46 31.875,45.65 v1(32.05,45.475)
  Top Layer w0.4: U5.4@5.2,76.4 5.2,73.719 9.7,69.219 v1(9.7,47.9)
  Bottom Layer w0.3: v1(9.7,47.9) 11.5,46.1 31.425,46.1 v1(32.05,45.475)
P2_11: R3.1 U1.52 | length 56.3
  Top Layer w0.254: U1.52@30.891,51.231 31.65,50.472 31.65,49.85 31.05,49.25 31.05,32.225 v1(31.775,31.5)
  Top Layer w0.5: v1(60.125,26.275) 60.125,24.375 61.175,23.325 R3.1@62.925,23.325
  Bottom Layer w0.4: v1(31.775,31.5) 34.275,29 49.35,29 50.825,27.525 58.925,27.525 60.15,26.3 60.175,26.275 v1(60.125,26.275)
P2_12: R2.1 U1.51 | length 22.2
  Top Layer w0.254: U1.51@30.537,50.877 30.537,29.769 R2.1@31.313,28.993
P2_13: R1.1 U1.50 | length 26.7
  Top Layer w0.254: U1.50@28.063,50.877 28.063,41.937 29.275,40.725 29.275,27.175 30.332,26.118 R1.1@31.288,26.118
RES: D10.1 U1.17 U13.29 | length 41.2
  Top Layer w0.254: v1(15.5,77.3) 15.5,75.675 15.7,75.475 15.7,73.9 16.795,72.805 D10.1@17.691,72.805 17.691,69.381 U1.17@22.406,64.666 ; v1(34.9,76.025) 35.463,76.025 U13.29@37.929,78.491
  Bottom Layer w0.3: v1(15.5,77.3) 24.1,77.3 24.875,76.525 31.875,76.525 32.925,77.575 33.9,77.575 34.55,76.925 34.55,76.375 v1(34.9,76.025)
pads on no net: D17.4 D17.5 J1.0 J1.4 J2.0 J2.7 JP2.7 JP4.0 JP4.9 JP4.10 JP4.11 JP4.12 JP4.13 JP4.14 JP4.15 JP4.16 U1.1 U1.2 U1.3 U1.4 U1.5 U1.6 U1.7 U1.8 U1.9 U1.14 U1.21 U1.25 U1.26 U1.27 U1.29 U1.30 U1.63 U1.68 U1.69 U1.70 U1.73 U1.74 U1.75 U1.79 U1.81 U1.82 U1.85 U1.100 U3.6 U3.8 U3.9 U3.10 U3.11 U3.12 U3.13 U3.14 U3.19 U3.22 U3.23 U3.24 U3.27 U3.28 U4.6 U4.11 U6.10 U6.11 U6.14 U7.10 U7.11 U7.14 U13.1 U13.5 U13.6 U13.8 U13.9 U13.10 U13.11 U13.12 U13.25 U13.33 U13.38 U13.42 U13.45 U13.46 U14.1

## Polygon pours and split planes (outlines as drawn)
GND on Top Layer (hatched 90Degree grid 0.1 track 0.3, remove dead copper): 26.35,17.1 164.1,17.1 164.1,32.025 26.15,32.025 26.15,17.1
GND_USB on Top Layer (hatched 90Degree grid 0.1 track 0.3, remove dead copper): -0.1,98.975 0.376,116.025 -0.1,116.025
GND_USB on Top Layer (hatched 90Degree grid 0.1 track 0.3, remove dead copper): -0.1,115.975 -0.1,81.975 12.7,81.975 12.7,91.95 15.075,94.325 15.075,99.075 24,99.075 26.05,101.125 26.05,116 -0.125,116
GND on Top Layer (hatched 90Degree grid 0.1 track 0.3, remove dead copper): -7.5,37.94 29.425,37.94 32.475,34.89 172.325,34.89 172.55,34.84 172.55,44.89 132.25,44.89 132.25,53.015 125.975,53.015 125.975,47.64 99.975,47.64 99.975,44.215 64.7,44.215 64.7,66.865 68.775,70.94 68.775,85.89 62.15,92.515 62.15,100.465 29.625,100.465 24.95,95.79 19.325,95.79 17.85,94.315 17.85,92.39 15.7,90.24 15.7,79.49 -7.5,79.49
+3V3 on Bottom Layer (hatched 90Degree grid 0.1 track 0.3, remove dead copper): 17.175,60.9 28.975,72.7 29.125,72.85 34.075,67.9 41.3,60.675 41.425,60.675 31.025,50.275 27.325,50.275 27.325,50.45 17.25,60.525 17.25,60.95
+3V3 on Bottom Layer (hatched 90Degree grid 0.1 track 0.3, remove dead copper): 34.275,81.125 41.425,73.975 48.3,80.85 41.25,87.9 34.55,81.2
GND on Bottom Layer (hatched 90Degree grid 0.1 track 0.3, remove dead copper): 26.2,17.106 26.2,32.006 164.025,32.006 164.025,17.181 26.225,17.181
GND_USB on Bottom Layer (hatched 90Degree grid 0.1 track 0.3, remove dead copper): -0.1,116.15 -0.1,81.925 12.65,81.925 12.65,92 15,94.35 15,99.15 23.925,99.15 25.975,101.2 25.975,116.025 -0.1,116.025
GND on Bottom Layer (hatched 90Degree grid 0.1 track 0.3, remove dead copper): 171.825,34.9 32.45,34.9 29.35,38 -6.9,38 -6.9,79.475 15.7,79.475 15.7,90.15 17.9,92.35 17.9,94.3 19.35,95.75 24.95,95.75 29.675,100.475 33.625,104.425 50.3,104.425 54.3,100.425 62.15,100.425 62.15,92.525 68.775,85.9 68.775,70.95 64.7,66.875 64.7,44.225 99.95,44.225 99.95,47.65 125.95,47.65 125.95,53.025 132.25,53.025 132.25,44.825 172.4,44.825 172.4,34.85 171.525,34.85 171.525,34.925

## Keep-outs
Keep-Out Layer:
  circle w0.254: c-3.75,99.9 r1.5
  circle w0.254: c-3.75,0 r1.5
  circle w0.254: c168.75,0 r1.5
  circle w0.254: c168.75,100 r1.5
  circle w0.254: c77.5,-10 r1.5
  circle w0.254: c87.5,-10 r1.5
  circle w0.254: c65,110 r1.5
  circle w0.254: c55,110 r1.5
  lines w0.3: -6.5,-16.5 171.5,-16.5 171.5,116.5 -6.5,116.5 -6.5,-16.5

## Other copper
Top Layer:
  rectangle: 137.4,59.475 140.575,63.125
  region: 137.363,59.512 140.125,62.275 137.225,65.176 134.462,62.413
  rectangle: 148.725,81.425 169.35,96.5
  rectangle: 134.475,62.375 153.15,82.5
  region: 142.388,74.524 156.495,88.63 148.575,96.55 134.468,82.443
  rectangle: 140.225,59.475 169.35,88.3

## Silkscreen, mask and mechanical layers (free items; w line width, h text height)
Mechanical 1:
  lines w0.254: 82.5,-33.8 82.5,120 ; 32.5,55 37.5,55 37.5,75 32.5,75 32.5,55
  lines w0.3: 0,0 0,100 165,100 165,0 0,0
Mechanical 2:
  circle w0.3: c-3.75,99.9 r1.5
  circle w0.3: c-3.75,0 r1.5
  circle w0.3: c168.75,0 r1.5
  circle w0.254: c77.5,-10 r1.5
  circle w0.254: c87.5,-10 r1.5
  circle w0.254: c65,110 r1.5
  circle w0.254: c55,110 r1.5
  circle w0.3: c168.75,100 r1.5
  lines w0.254: -11.4,-13.6 -11.3,-13.5 ; 7.4,-17.5 7.5,-17.4 ; 7.4,117.4 7.5,117.3 ; 157,-1.9 157.1,-2 ; 157.5,-17.4 157.6,-17.5 ; 157.5,117.4 157.6,117.5 ; 52.4,95 67.5,95 67.5,117.4 67.4,117.5 52.4,117.5 52.4,95 ; 75,-17.4 75.1,-17.5 90.1,-17.5 90.1,5 75,5 75,-17.4
  lines w0.3: 7.4,-17.5 -7.5,-17.5 -7.5,10 7.5,10 7.5,-17.4 ; 7.4,117.4 -7.5,117.4 -7.5,89.9 7.5,89.9 7.5,117.3 ; 157.5,-17.4 157.5,10 172.5,10 172.5,-17.5 157.6,-17.5 ; 157.5,117.4 157.5,90 172.5,90 172.5,117.5 157.6,117.5

## Dimensions
0,100 to 0,0 on Mechanical 1
-6.5,116.5 to -6.5,-16.5 on Mechanical 1
-6.5,116.5 to 171.5,116.5 on Mechanical 1
0,100 to 165,100 on Mechanical 1